# Altium PCB PCB2.PcbDoc (part 1 of 2)
Units mm, origin at the board's own origin, x right, y up, seen from the top; angles counter-clockwise.
Board outline 392.94 x 181.74 mm, 2 copper layers (Top Layer, Bottom Layer); 104 components, 82 nets, 455 pads, 733 vias.
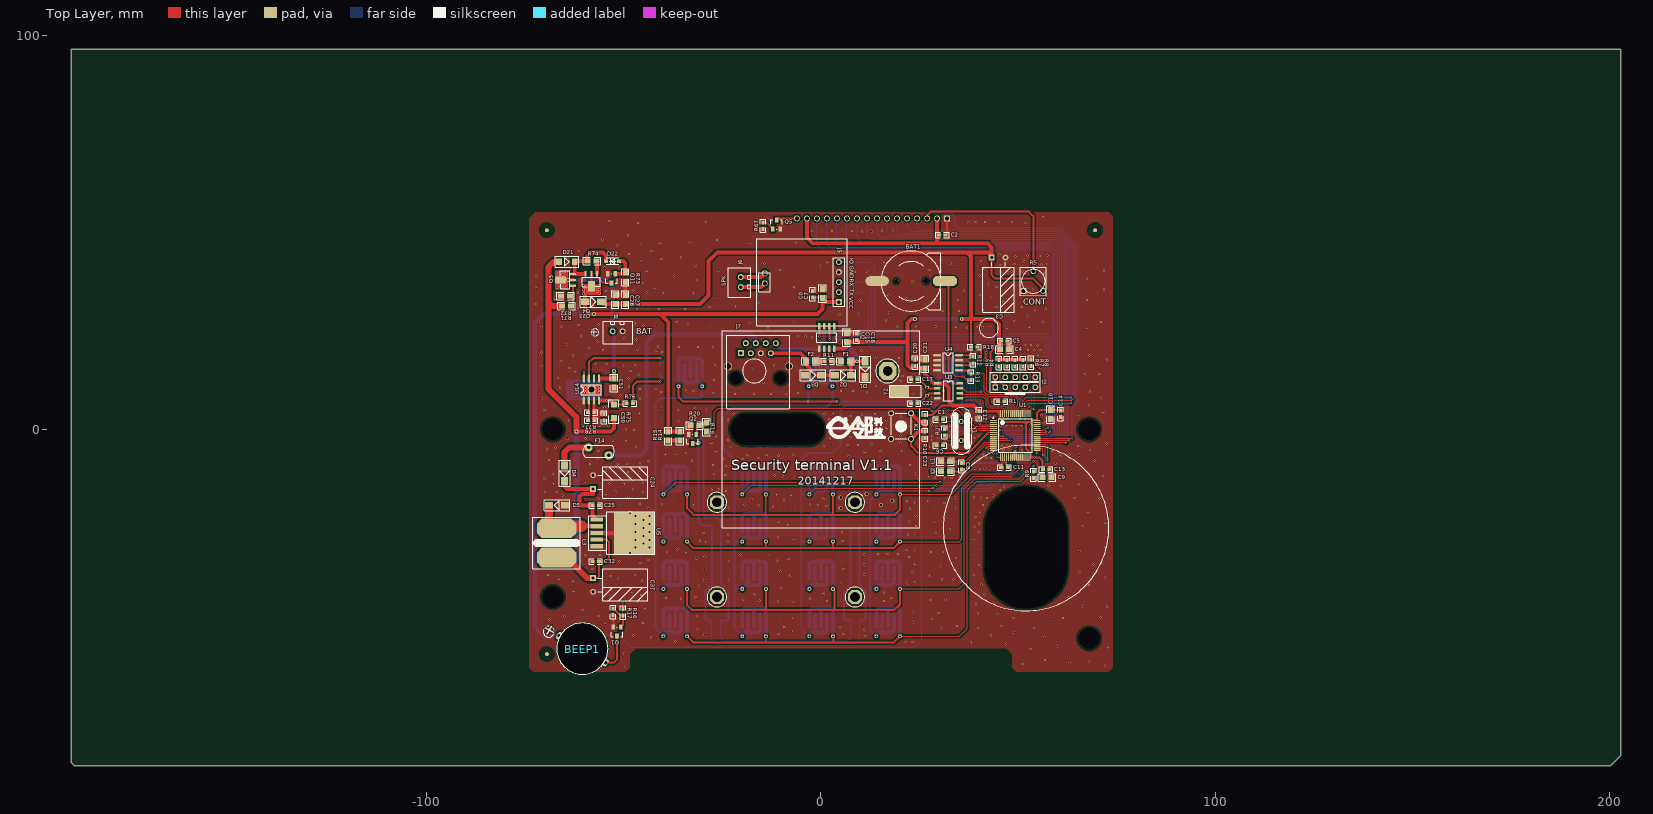
[diagram p0: Top Layer view]
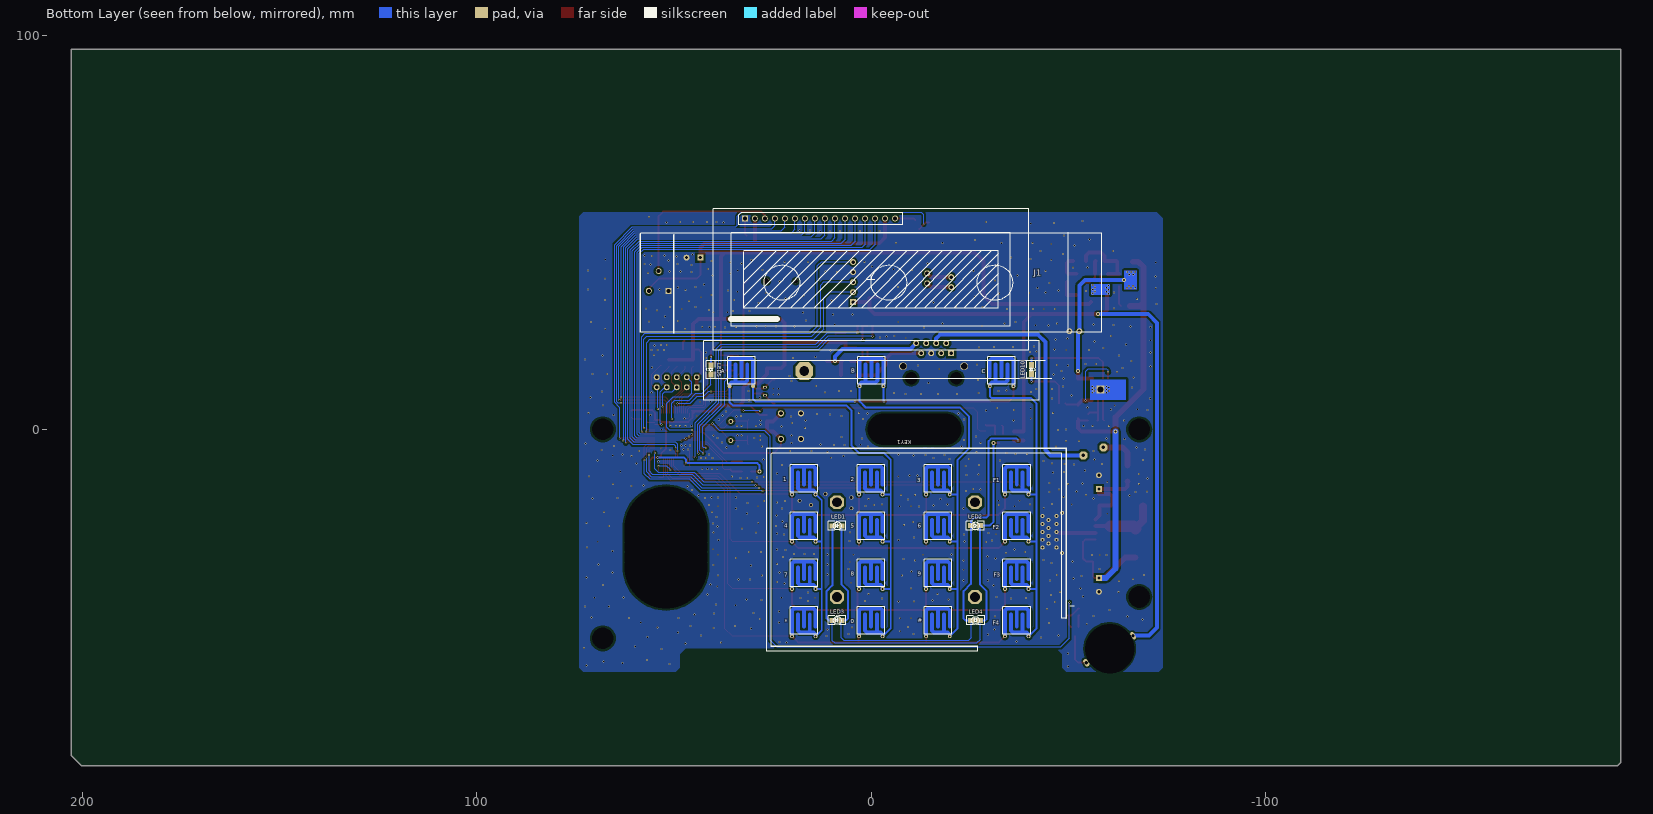
[diagram p1: Bottom Layer view, seen from below]

## Layer stack, top to bottom
Top Solder: solder mask 0.0102, Solder Resist, Dk 3.5
Top Layer: signal copper 0.0356
Dielectric1: dielectric 0.32, FR-4, Dk 4.8
Bottom Layer: signal copper 0.0356
Bottom Solder: solder mask 0.0102, Solder Resist, Dk 3.5

## Board outline
-190.119,96.393 202.819,96.393 202.819,-82.677 200.66,-84.836 200.152,-85.344 -54.229,-85.344 -189.23,-85.344 -190.119,-84.455

## Design rules (kind name [scope] priority, off if disabled: settings)
Clearance [All] p1: gap=0.5
PolygonConnect [All] p1: connectstyle=Direct reliefconductorwidth=0.5 reliefentries=4 polygonreliefangle="90 Angle" airgapwidth=0.254
RoutingVias [All] p1: holewidth=0.711 width=1.27 viastyle="Through Hole" minholewidth=0.711 minwidth=1.27 maxholewidth=0.711 maxwidth=1.27
SilkToSolderMaskClearance SilkscreenOverComponentPads [IsPad] p1: minsilkscreentomaskgap=0.254 clearancetoexposedcopper=TRUE
SolderMaskExpansion [All] p1: expansion=0.102
Width [All] p1: maxlimit=5 minlimit=0.254 preferedwidth=0.254
28 further rules are at their usual default settings.

## Components (designator, comment, footprint, x,y, rotation, side; value= is the part's Value field where it differs from the comment)
BAT1 "BATT" CR1220 22.86,37.592 r90 top locked
BEEP1 "BEEP" BEEP-12W -66.45,-52.324 r330 top locked
C0 "0.1uF" 0603 -2.119,35.13 r270 top locked
C1 "18p" 0603 30.988,2.54 r180 top locked
C2 "0.1uF" 0603 29.972,49.276 r0 top locked
C3 "470uF" RB3.5-w#1 50.292,41.148 r0 top locked
C4 "0.1uF" 0603 47.344,22.464 r180 top locked
C5 "10uF" 0805 47.738,20.302 r180 top locked
C6 "18p" 0603 30.988,-4.064 r180 top locked
C7 "10uF/16V" 0805 0.421,35.638 r270 top locked
C8 "0.1uF" 0603 35.668,-10.216 r90 top locked
C9 "10uF/25V" 0805 58.42,-12.192 r180 top locked
C10 "10uF/25V" 0805 58.24,2.572 r90 top locked
C11 "0.1uF" 0603 45.72,-9.652 r0 top locked
C12 "0.1uF" 0603 40.132,3.048 r90 top locked
C13 "0.1uF" 0603 57.912,-10.16 r180 top locked
C14 "0.1uF" 0603 60.78,3.08 r90 top locked
C15 "10uF" 0805 6.44,22.12 r90 top locked
C16 "0.1uF" 0603 8.98,22.628 r90 top locked
C17 "18P" 0603 22.86,12.7 r0 top locked
C20 "0.1uF" 0603 23.876,17.78 r270 top locked
C21 "10uF" 0805 26.416,17.78 r270 top locked
C22 "18P" 0603 22.86,6.604 r0 top locked
C23 "0.1uF" 0603 26.416,-0.508 r270 top locked
C24 "470uF" RB3.5-w#1 -55.372,-8.128 r90 top locked
C25 "0.1uF" 0603 -56.268,-19.26 r180 top locked
C27 "10uF/25V" 0805 -49.626,31.842 r90 top locked
C28 "0.1uF" 0805 -52.166,31.842 r90 top locked
C31 "470uF" RB3.5-w#2 -55.372,-44.704 r270 top locked
C32 "0.1uF" 0603 -57.912,-33.528 r0 top locked
C50 "0.1uF/25V" 0603 -55.026,2.218 r90 top locked
C51 "10uF/25V" 0805 -52.486,12.886 r270 top locked
D1 "TVS" SMB 11.176,17.272 r270 top locked
D2 "TVS" SMB 3.556,13.716 r0 top locked
D3 "TVS" SMB -4.064,13.716 r0 top locked
D4 "B340" SMB -65.024,-9.144 r270 top locked
D5 "B340" SMB -64.904,-19.26 r180 top locked
D21 "IN4007" SMA(DO-214AC) -66.39,42.51 r0 top locked
D22 "3V" sod-123 -52.832,42.672 r180 top locked
D23 "IN4007" SMB -59.786,32.35 r0 top locked
F1 "FUSE2" 0805 5.08,17.272 r0 top locked
F2 "FUSE2" 0805 -1.524,17.272 r180 top locked
F14 "FUSE2" FUSE-RL60-050 -56.388,-5.588 r180 top locked
J1 "LCD1602A" LCD-1602A 0,38 r180 bottom
J2 "JTAG" JTAG_10 44.196,10.668 r0 top locked
J5 "2.54-7" SYN6288 -16.343,48.338 r270 top locked
J6 "SIP2A-2.50（带槽）" 2.54 -17.78,33.528 r90 top locked
J7 "RJ45" RJ45-1 -20.32,19.304 r180 top locked
J8 "SIP2A-2.54" 2.54 -47.752,27.432 r180 top locked
K1 "KEY_M" KEY_M 22.86,4.064 r270 top locked
KEY1 "SW-17" KEY-17 -2.032,-18.796 r0 top locked
L1 "100R" 0805 30.48,-8.128 r0 top locked
L2 "100R" 0805 30.48,-10.668 r0 top locked
L3 "33uH" INDUCTOR-1212 -73.032,-22.308 r270 top locked
LED1 "" LED-0805 7.5,-24.45 r0 bottom locked
LED2 "" LED-0805 -25.3,-24.384 r180 bottom locked
LED3 "" LED-0805 7.5,-48.45 r0 bottom locked
LED4 "" LED-0805 -25.4,-48.45 r180 bottom locked
LED5 "LED-R" LED-0805 40.64,16.256 r270 bottom locked
LED10 "LED-R" LED-0805 -40.64,14 r90 bottom
Q1 "3904" SOT-23 -50.758,-50.171 r180 top locked
Q2 "3904" SOT-23 -31.605,-1.242 r180 top locked
Q3 "2SJ517" SOT-89 -62.834,36.414 r90 top locked
Q4 "2SJ517" SOT-89 -56.738,39.462 r180 top locked
Q5 "3904" SOT-23 -12.192,50.8 r0 top
Q11 "3904" SOT-23 -52.166,39.462 r180 top locked
R1 "10K" 0603 46.5,7.112 r180 top locked
R2 "1M" 0603 31.284,0.084 r270 top locked
R3 "10K" 0603 45.098,17.65 r270 top locked
R4 "10K" 0603 47.13,17.65 r270 top locked
R5 "10K" RM065-V1 53.848,40.132 r270 top locked
R6 "10K" 0603 49.162,17.65 r270 top locked
R7 "10K" 0603 51.194,17.65 r270 top locked
R8 "10K" 0603 53.226,16.126 r90 top locked
R9 "10K" 0603 53.848,-10.668 r270 top locked
R10 "10K" 0603 26.416,2.032 r90 top locked
R11 "120R" 0603 2.54,17.272 r180 top locked
R12 "4.7K" 0603 38.6,16.764 r90 top locked
R13 "4.7K" 0603 38.1,14.224 r270 top locked
R14 "510R" 0805 -35.8,-0.532 r270 top locked
R15 "510R" 0805 -38.732,-0.532 r270 top locked
R16 "1K" 0603 -50.25,-45.599 r270 top locked
R17 "10K" 0603 -52.79,-47.123 r90 top locked
R18 "1K" 0603 39.751,20.828 r180 top locked
R19 "1K" 0805 -29.08,-0.532 r90 top locked
R20 "10K" 0805 -33.144,0.992 r0 top locked
R67 "10K" 0603 -14.732,50.8 r90 top
R71 "120" 0805 -63.342,31.334 r180 top locked
R72 "4.7K" 0805 -65.882,33.874 r0 top locked
R73 "4.7K" 0805 -49.626,37.43 r90 top locked
R74 "4.7K" 0805 -56.896,42.672 r180 top locked
R75 "0.4" 1206 -52.486,6.282 r270 top locked
R76 "1K" 0603 -49.276,6.604 r0 top locked
R77 "2.7K" 0603 -59.09,4.25 r0 top locked
R78 "2.7K" 0603 -59.09,2.218 r0 top locked
U1 "STM32F103RBT6" LQFP64_N 49.276,-1.524 r0 top locked
U2 "SP3485" SOP-8 3.392,26.184 r270 top locked
U3 "DS1302" SOP-8 29.464,11.684 r0 top locked
U4 "24C02" SO-8 29.464,18.796 r0 top locked
U5 "LM2596S_5.0" TO-263-5 -56.896,-22.86 r180 top locked
U14 "TP4056" SO8E -60.106,7.298 r90 top locked
Y1 "8MHz" XTAL_US 35.56,2.032 r270 top locked
Y2 "32.768KHz" cs-308 25.4,8.128 r180 top locked
? "Comment" e邻 4.572,-2.032 r0 top locked

## Footprints (in the part's own frame and the unit in brackets; to place one, negate y for a bottom-side part, rotate by r counter-clockwise, add the part's x,y. Pads: shape width x height; smd on the part's side, far side on the other; paste and mask are expansions set on the pad)
2.54 [mm]
  round 1.5 hole 0.9: 1(5.08,2.54) 2(2.54,2.54)
  silkscreen extent 0,0 7.5,5.7
0603 [mil]
  rect 40x30 smd: 1(0,0) 2(65,0)
  silkscreen extent -33,-28 98,28
0805 [mil]
  rect 60x50 smd: 1(0,0) 2(90,0)
  silkscreen extent -42,-37 132,37
1206 [mil]
  rect 60x60 smd: 1(0,0) 2(135,0)
  silkscreen extent -50,-50 185,50
BEEP-12W [mm]
  oval 1x2 hole 0.8: 1(0,0)
  oval 1.2x2 hole 0.8: 2(13.7,0)
CR1220 [mm]
  round 1.1 hole 1.1 unplated: 0(0,3.748)
  round 1.5 hole 1.5 unplated: 0(0.025,-3.752)
  oct 2.5x6 smd: 1(0,-8.602)
  oval 2.5x6 smd: 2(0,8.598)
  silkscreen extent -7.62,-7.58 7.62,7.57
cs-308 [mm]
  oval 1x0.7 hole 0.5: 1(-1.524,-0.508) 2(-1.524,-2.54)
  rect 5x3 smd: 3(5.588,-1.524)
  silkscreen extent 0,-3 8,0
e邻 [mm]
  silkscreen extent -3.2,-0.25 11.91,5.33
FUSE-RL60-050 [mm]
  oct 2x2 hole 0.9: 1(-2.55,1) 2(2.55,-1)
  silkscreen extent -4.02,-1.5 4.02,1.5
INDUCTOR-1212 [mm]
  oct 5x10 smd: 1(2.8,6) 2(10.2,6)
  silkscreen extent 0,0 13,12
JTAG_10 [mm]
  rect 1.5x1.5 hole 0.9: 1(0,0)
  round 1.5 hole 0.9: 2(0,2.54) 3(2.54,0) 4(2.54,2.54) 5(5.08,0) 6(5.08,2.54) 7(7.62,0) 8(7.62,2.54) 9(10.16,0) 10(10.16,2.54)
  silkscreen extent -1.27,-1.78 11.43,3.81
KEY-17 [mm]
  round 1 hole 0.5: 1(22.075,2.325) 2(16.075,2.325) 3(5.075,2.325) 4(-0.925,2.325) 5(-11.925,2.325) 6(-17.925,2.325) 7(-31.925,2.325) 8(-37.925,2.325) 9(22.075,-9.675) 10(16.075,-9.675) 11(5.075,-9.675) 12(-0.925,-9.675) 13(-11.925,-9.675) 14(-17.925,-9.675) 15(-31.925,-9.675) 16(-37.925,-9.675) 17(22.075,-21.675) 18(16.075,-21.675) 19(5.075,-21.675) 20(-0.925,-21.675) 21(-11.925,-21.675) 22(-17.925,-21.675) 23(-31.925,-21.675) 24(-37.925,-21.675) 25(22.075,-33.675) 26(16.075,-33.675) 27(5.075,-33.675) 28(-0.925,-33.675) 29(-11.925,-33.675) 30(-17.925,-33.675) 31(-31.925,-33.675) 32(-37.925,-33.675) 35(-1.075,29.725) 36(4.925,29.725) 37(-34.075,29.725) 38(-28.075,29.725)
  round 1 smd far side: 33(31.925,29.725) 34(37.925,29.725)
  Bottom Layer lines w1: -37.925,-33.675 -37.925,-33.175 -37.425,-32.675 -33.925,-32.675 -33.425,-32.175 -33.425,-28.175 ; -37.925,-31.175 -37.925,-27.175 -37.425,-26.675 -32.425,-26.675 -31.925,-27.175 -31.925,-33.675 ; -37.925,-21.675 -37.925,-21.175 -37.425,-20.675 -33.925,-20.675 -33.425,-20.175 -33.425,-16.175 ; -37.925,-19.175 -37.925,-15.175 -37.425,-14.675 -32.425,-14.675 -31.925,-15.175 -31.925,-21.675 ; -37.925,-9.675 -37.925,-9.175 -37.425,-8.675 -33.925,-8.675 -33.425,-8.175 -33.425,-4.175 ; -37.925,-7.175 -37.925,-3.175 -37.425,-2.675 -32.425,-2.675 -31.925,-3.175 -31.925,-9.675 ; -37.925,2.325 -37.925,2.825 -37.425,3.325 -33.925,3.325 -33.425,3.825 -33.425,7.825 ; -37.925,4.825 -37.925,8.825 -37.425,9.325 -32.425,9.325 -31.925,8.825 -31.925,2.325 ; -36.425,-32.675 -36.425,-28.175 ; -36.425,-20.675 -36.425,-16.175 ; -36.425,-8.675 -36.425,-4.175 ; -36.425,3.325 -36.425,7.825 ; -34.925,-31.175 -34.925,-26.675 ; -34.925,-19.175 -34.925,-14.675 ; -34.925,-7.175 -34.925,-2.675 ; -34.925,4.825 -34.925,9.325 ; -34.075,29.725 -34.075,36.225 -33.575,36.725 -28.575,36.725 -28.075,36.225 -28.075,32.225 ; -32.575,35.225 -32.575,31.225 -32.075,30.725 -28.575,30.725 -28.075,30.225 -28.075,29.725 ; -31.075,32.225 -31.075,36.725 ; -29.575,30.725 -29.575,35.225 ; -17.925,-33.675 -17.925,-33.175 -17.425,-32.675 -13.925,-32.675 -13.425,-32.175 -13.425,-28.175 ; -17.925,-31.175 -17.925,-27.175 -17.425,-26.675 -12.425,-26.675 -11.925,-27.175 -11.925,-33.675 ; -17.925,-21.675 -17.925,-21.175 -17.425,-20.675 -13.925,-20.675 -13.425,-20.175 -13.425,-16.175 ; -17.925,-19.175 -17.925,-15.175 -17.425,-14.675 -12.425,-14.675 -11.925,-15.175 -11.925,-21.675 ; -17.925,-9.675 -17.925,-9.175 -17.425,-8.675 -13.925,-8.675 -13.425,-8.175 -13.425,-4.175 ; -17.925,-7.175 -17.925,-3.175 -17.425,-2.675 -12.425,-2.675 -11.925,-3.175 -11.925,-9.675 ; -17.925,2.325 -17.925,2.825 -17.425,3.325 -13.925,3.325 -13.425,3.825 -13.425,7.825 ; -17.925,4.825 -17.925,8.825 -17.425,9.325 -12.425,9.325 -11.925,8.825 -11.925,2.325 ; -16.425,-32.675 -16.425,-28.175 ; -16.425,-20.675 -16.425,-16.175 ; -16.425,-8.675 -16.425,-4.175 ; -16.425,3.325 -16.425,7.825 ; -14.925,-31.175 -14.925,-26.675 ; -14.925,-19.175 -14.925,-14.675 ; -14.925,-7.175 -14.925,-2.675 ; -14.925,4.825 -14.925,9.325 ; -1.075,29.725 -1.075,36.225 -0.575,36.725 4.425,36.725 4.925,36.225 4.925,32.225 ; -0.925,-33.675 -0.925,-33.175 -0.425,-32.675 3.075,-32.675 3.575,-32.175 3.575,-28.175 ; -0.925,-31.175 -0.925,-27.175 -0.425,-26.675 4.575,-26.675 5.075,-27.175 5.075,-33.675 ; -0.925,-21.675 -0.925,-21.175 -0.425,-20.675 3.075,-20.675 3.575,-20.175 3.575,-16.175 ; -0.925,-19.175 -0.925,-15.175 -0.425,-14.675 4.575,-14.675 5.075,-15.175 5.075,-21.675 ; -0.925,-9.675 -0.925,-9.175 -0.425,-8.675 3.075,-8.675 3.575,-8.175 3.575,-4.175 ; -0.925,-7.175 -0.925,-3.175 -0.425,-2.675 4.575,-2.675 5.075,-3.175 5.075,-9.675 ; -0.925,2.325 -0.925,2.825 -0.425,3.325 3.075,3.325 3.575,3.825 3.575,7.825 ; -0.925,4.825 -0.925,8.825 -0.425,9.325 4.575,9.325 5.075,8.825 5.075,2.325 ; 0.425,35.225 0.425,31.225 0.925,30.725 4.425,30.725 4.925,30.225 4.925,29.725 ; 0.575,-32.675 0.575,-28.175 ; 0.575,-20.675 0.575,-16.175 ; 0.575,-8.675 0.575,-4.175 ; 0.575,3.325 0.575,7.825 ; 1.925,32.225 1.925,36.725 ; 2.075,-31.175 2.075,-26.675 ; 2.075,-19.175 2.075,-14.675 ; 2.075,-7.175 2.075,-2.675 ; 2.075,4.825 2.075,9.325 ; 3.425,30.725 3.425,35.225 ; 16.075,-33.675 16.075,-33.175 16.575,-32.675 20.075,-32.675 20.575,-32.175 20.575,-28.175 ; 16.075,-31.175 16.075,-27.175 16.575,-26.675 21.575,-26.675 22.075,-27.175 22.075,-33.675 ; 16.075,-21.675 16.075,-21.175 16.575,-20.675 20.075,-20.675 20.575,-20.175 20.575,-16.175 ; 16.075,-19.175 16.075,-15.175 16.575,-14.675 21.575,-14.675 22.075,-15.175 22.075,-21.675 ; 16.075,-9.675 16.075,-9.175 16.575,-8.675 20.075,-8.675 20.575,-8.175 20.575,-4.175 ; 16.075,-7.175 16.075,-3.175 16.575,-2.675 21.575,-2.675 22.075,-3.175 22.075,-9.675 ; 16.075,2.325 16.075,2.825 16.575,3.325 20.075,3.325 20.575,3.825 20.575,7.825 ; 16.075,4.825 16.075,8.825 16.575,9.325 21.575,9.325 22.075,8.825 22.075,2.325 ; 17.575,-32.675 17.575,-28.175 ; 17.575,-20.675 17.575,-16.175 ; 17.575,-8.675 17.575,-4.175 ; 17.575,3.325 17.575,7.825 ; 19.075,-31.175 19.075,-26.675 ; 19.075,-19.175 19.075,-14.675 ; 19.075,-7.175 19.075,-2.675 ; 19.075,4.825 19.075,9.325 ; 31.925,29.725 31.925,36.225 32.425,36.725 37.425,36.725 37.925,36.225 37.925,32.225 ; 33.425,35.225 33.425,31.225 33.925,30.725 37.425,30.725 37.925,30.225 37.925,29.725 ; 34.925,32.225 34.925,36.725 ; 36.425,30.725 36.425,35.225
KEY_M [mil]
  round 62 hole 38: 1(0,0) 1(255.91,0) 2(0,-200) 2(255.91,-200)
  silkscreen extent 0,-200 255,0
LCD-1602A [mm]
  rect 1.5x1.5 hole 1: 1(-32,15.5)
  round 1.5 hole 1: 2(-29.46,15.5) 3(-26.92,15.5) 4(-24.38,15.5) 5(-21.84,15.5) 6(-19.3,15.5) 7(-16.76,15.5) 8(-14.22,15.5) 9(-11.68,15.5) 10(-9.14,15.5) 11(-6.6,15.5) 12(-4.06,15.5) 13(-1.52,15.5) 14(1.02,15.5) 15(3.56,15.5) 16(6.1,15.5)
  silkscreen extent -40,-18 40,18
LED-0805 [mil]
  rect 60x50 smd: 1(0,0) 2(90,0)
  silkscreen extent -43,-46 134,45
LQFP64_N [mm] "Thin QFP, 64-Leads, Body 10x10mm, Pitch 0.5mm, IPC Medium Density"
  oval 1.8x0.3 smd: 1(-5.55,3.75) 2(-5.55,3.25) 3(-5.55,2.75) 4(-5.55,2.25) 5(-5.55,1.75) 6(-5.55,1.25) 7(-5.55,0.75) 8(-5.55,0.25) 9(-5.55,-0.25) 10(-5.55,-0.75) 11(-5.55,-1.25) 12(-5.55,-1.75) 13(-5.55,-2.25) 14(-5.55,-2.75) 15(-5.55,-3.25) 16(-5.55,-3.75) 33(5.55,-3.75) 34(5.55,-3.25) 35(5.55,-2.75) 36(5.55,-2.25) 37(5.55,-1.75) 38(5.55,-1.25) 39(5.55,-0.75) 40(5.55,-0.25) 41(5.55,0.25) 42(5.55,0.75) 43(5.55,1.25) 44(5.55,1.75) 45(5.55,2.25) 46(5.55,2.75) 47(5.55,3.25) 48(5.55,3.75)
  oval 0.3x1.8 smd: 17(-3.75,-5.55) 18(-3.25,-5.55) 19(-2.75,-5.55) 20(-2.25,-5.55) 21(-1.75,-5.55) 22(-1.25,-5.55) 23(-0.75,-5.55) 24(-0.25,-5.55) 25(0.25,-5.55) 26(0.75,-5.55) 27(1.25,-5.55) 28(1.75,-5.55) 29(2.25,-5.55) 30(2.75,-5.55) 31(3.25,-5.55) 32(3.75,-5.55) 49(3.75,5.55) 50(3.25,5.55) 51(2.75,5.55) 52(2.25,5.55) 53(1.75,5.55) 54(1.25,5.55) 55(0.75,5.55) 56(0.25,5.55) 57(-0.25,5.55) 58(-0.75,5.55) 59(-1.25,5.55) 60(-1.75,5.55) 61(-2.25,5.55) 62(-2.75,5.55) 63(-3.25,5.55) 64(-3.75,5.55)
  silkscreen extent -5.67,-4.25 4.25,4.57, body extent -5,-5 5,5, height 1.6
RB3.5-w#1 [mm]
  rect 1.5x1.5 hole 0.813: 1(-7,2.4)
  round 1.5 hole 0.813: 2(-3.5,2.4)
  silkscreen extent -9.3,-11.5 -1.3,1.2
RB3.5-w#2 [mm]
  rect 1.5x1.5 hole 0.813: 1(-7,-2.4)
  round 1.5 hole 0.813: 2(-3.5,-2.4)
  silkscreen extent -9.3,-1.2 -1.3,11.5
RJ45-1 [mil]
  rect 60x60 hole 35: 1(0,0)
  round 60 hole 35: 2(-50,-100) 3(-100,0) 4(-150,-100) 5(-200,0) 6(-250,-100) 7(-300,0) 8(-350,-100)
  round 78.74 hole 64.96: 9(129.92,130) 10(-480.31,130)
  oct 0x0 hole 125.98: ""(-400,250) ""(50,250)
  silkscreen extent -490,-180 140,553
RM065-V1 [mm]
  rect 1.5x1.5 hole 1: 1(5,-2.5)
  round 1.5 hole 1: 2(0,0) 3(5,2.5)
  silkscreen extent -1.02,-3.25 6.2,3.25
SMA(DO-214AC) [mm]
  rect 1.5x1.6 smd: 1(0,0) 2(3.95,0)
  silkscreen extent -1,-1.38 5,1.38
SMB [mm]
  rect 2.1x1.7 smd: 1(0,0) 2(4.05,0)
  silkscreen extent -1.25,-1.4 5.3,1.4
SO8E [mil]
  oval 80x24 smd: 1(0,0) 2(0,-50) 3(0,-100) 4(0,-150) 5(220,-150) 6(220,-100) 7(220,-50) 8(220,0)
  rect 78.74x78.74 hole 59.05: 9(110,-75)
  silkscreen extent 60,-175 160,25
SO-8 [mil]
  oval 80x24 smd: 1(0,0) 2(0,-50) 3(0,-100) 4(0,-150) 5(220,-150) 6(220,-100) 7(220,-50) 8(220,0)
  silkscreen extent 60,-175 160,25
sod-123 [mil]
  rrect25% 40x35 smd: 1(-64,0) 2(64,0)
  silkscreen extent -62,-33 62,34, body extent -76,-33 76,34, height 56
SOP-8 [mil]
  rect 65x25 smd: 1(0,0) 2(0,-50) 3(0,-100) 4(0,-150) 5(224.41,-150) 6(224.41,-100) 7(224.41,-50) 8(224.41,0)
  silkscreen extent 65,-175 159,25
SOT-23 [mil]
  rect 36x50 smd: 1(0,0) 2(75,0) 3(37.5,90)
  silkscreen extent -20,0 95,95
SOT-89 [mm]
  rect 0.52x1.5 smd: 1(0,0) 2(1.5,0) 3(3,0)
  rect 1.8x2.7 smd: 4(1.5,3.2)
  silkscreen extent -0.8,0.9 3.8,3.25
SYN6288 [mm]
  rect 1.5x1.5 hole 0.9: 1(16.08,20.9)
  round 1.5 hole 0.9: 2(13.54,20.9) 3(11,20.9) 4(8.46,20.9) 5(5.92,20.9)
  round 1.5 hole 1: 6(8.76,2.1) 7(11.3,2.1)
  silkscreen extent 0,0 22,23
TO-263-5 [mm]
  rect 3.176x1.07 smd: 1(0,0) 2(0,1.7) 3(0,3.4) 4(0,5.1) 5(0,6.8)
  round 1 hole 0.5: 6(-8.45,-1.695) 8(-8.45,8.465)
  rect 10.16x10.668 smd: 7(-9.5,3.404)
  silkscreen extent -14.73,-2 1.98,8.8
XTAL_US [mil]
  round 50 hole 28: 1(0,0) 2(192.13,0)
  silkscreen extent -136,-98 328,98

## Part data
BAT1: library part BAT
C0 C1 C6 C7: library part CAP, "陶瓷电容"
C2 C3 C4 C5 C8 C9 C10 C11 C12 C13 C14 C15 C16 C20 C21 C23 C24 C27 C28 C31 C50 C51: library part CAP
C17 C22 C25 C32: library part C
D1 D2 D3: "SMBJ12CA"
D4: library part 1N5824(SS54), "肖特基二极管"
D5 D21 D23: library part DIODE
D22: library part 1N5824(SS54), "3V稳压管"
F1 F2: "SMD0805P010TS"
F14: "RL60-050"
J2: library part JTAG_10
J8: library part SIP2A-2.50（带槽）
L1 L2 L3: library part INDUCTOR
LED1 LED2 LED3 LED4: library part LED, "蓝色LED"
LED5: library part LED-RED, "绿色LED"
LED10: library part LED-RED, "红色LED"
Q1 Q2 Q5 Q11: library part NPN1
Q3 Q4: library part "MOSFET P_1"
R1 R9 R10 R14 R15 R75 R76 R77 R78: library part RES1
R2 R3 R4 R6 R7 R8 R11 R12 R13: library part RES-1%, "高精度电阻"
R5: library part POT2
R16 R17 R19 R20 R67: library part R
R18: library part Res
R71 R72 R73 R74: library part RESISTOR, "Resistor"
U2: library part MAX3485
U3: "实时时钟"
U4: library part 24C256
U5: "3A开关电源芯片"
Y1 Y2: library part XTAL, "Crystal Oscillator"

## Free pads (board coordinates)
  oct 1x1 hole 0.5: 0(-43.5,-22) 1(-43.5,-24) 2(-43.5,-26) 3(-43.5,-28) 4(-43.5,-30) 5(-45,-23) 6(-45,-25) 7(-45,-27) 8(-45,-29) 9(-47,-30) 10(-47,-28) 11(-47,-26) 12(-47,-24) 13(-47,-22)
  round 1 smd mask+1: 2(-69.5,-57) 2(-69.5,50.5) 2(69.5,50.5)
  oct 0.5x0.5 hole 0.3: 14(-67,39.9) 15(-66,39.9) 16(-65,39.9) 17(-67,35.9) 18(-65.9,35.9) 19(-64.9,35.9) 20(-65.5,39.3) 21(-66.5,39.3) 22(-66.4,36.4) 23(-65.4,36.4) 24(-56.2,34.5) 25(-56.2,35.5) 26(-56.2,36.6) 27(-56.8,36) 28(-56.8,35) 29(-60.2,34.4) 30(-60.2,35.4) 31(-60.2,36.5) 32(-59.7,35.9) 33(-59.7,34.9)
  round 0 hole 5.5: ""(-68,-42.5) ""(-68,0) ""(68,-53) ""(68,0)
  round 0 hole 12.5: ""(-60.5,-55.6)
  oct 3.5x3.5 hole 2.5: ""(-26.4,-42.5) ""(-26.4,-18.5) ""(8.6,-42.5) ""(8.6,-18.5)
  round 0 hole 8: ""(-18.999,0) ""(-18,0) ""(-17.069,0) ""(-16.2,0) ""(-15.062,0) ""(-14.2,0) ""(-13.005,0) ""(-12,0) ""(-11.049,0) ""(-10.2,0) ""(-9.144,0) ""(-8.2,0) ""(-7.061,0) ""(-6.1,0) ""(-5.105,0) ""(-4.1,0) ""(-3.099,0)
  oct 4.5x4.5 hole 2.5: ""(16.925,14.8)
  round 0 hole 21: ""(51.994,-34.95) ""(51.994,-32.461) ""(51.994,-29.87) ""(51.994,-27.356) ""(51.994,-24.968)

## Via types
v1: diameter 0.5, hole 0.3, Top Layer to Bottom Layer, tented both sides, 719 vias
v2: diameter 1, hole 0.5, Top Layer to Bottom Layer, tented both sides, 9 vias
v3: diameter 1, hole 0.7, Top Layer to Bottom Layer, tented both sides, 5 vias

## Nets (pads, with @x,y where several pads share a name; then routed paths per layer and width w, separated by ;. In a path a pad name is that pad's centre, name@x,y a point inside that pad or via, vN(x,y) a via of type N, cw(c..) or ccw(c..) an arc to the next point about the centre after c; other vN are vias at no path point)
485_A: D2.1 D3.2 F2.2 J7.7 | length 19.4
  Top Layer w1: J7.7@-12.7,19.304 -5.204,19.304 -3.81,17.91 F2.2@-3.81,17.272 -3.81,16.41 -1.116,13.716 D3.2@-0.014,13.716 D2.1@3.556,13.716
485_B: D1.1 D2.2 F1.2 J7.8 | length 30.9
  Top Layer w0.5: D2.2@7.366,13.956 D2.2@7.606,13.716
  Top Layer w1: D2.2@7.606,13.716 7.606,17.032 F1.2@7.366,17.272 v2(9.1,17.272) D1.1@11.176,17.272
  Bottom Layer w1: J7.8@-11.43,21.844 -9.986,20.4 7.2,20.4 9.1,18.5 v2(9.1,17.272)
BEEP: R16.1 U1.3 | length 161.5
  Top Layer w0.254: v1(-50.3,-43.9) -50.3,-45.549 R16.1@-49.949,-45.549 ; v1(40.2,1.5) 40.474,1.226 U1.3@43.726,1.226 42.274,1.226
  Bottom Layer w0.254: v1(-50.3,-43.9) -50.3,-53 -48,-55.3 23.8,-55.3 25.6,-53.5 25.6,-1.7 27,-0.3 38.4,-0.3 v1(40.2,1.5)
DS_IO: U1.61 U3.6 | length 15.4
  Top Layer w0.254: U3.6@35.5,8.992 35.408,8.9 41.3,8.9 42.4,7.8 42.4,6.4 42.8,6 46.5,6 47.026,5.474 U1.61@47.026,4.026
DS_RST: U1.62 U3.5 | length 14.8
  Top Layer w0.254: U3.5@35.164,7.874 36.1,7.874 36.531,8.305 41.095,8.305 41.9,7.5 41.9,6 42.4,5.5 46.1,5.5 46.526,5.074 U1.62@46.526,4.026
DS_SCLK: U1.57 U3.7 | length 18.1
  Top Layer w0.254: U3.7@35.164,10.414 36.086,10.414 36.9,9.6 v1(40.6,9.6) ; U1.57@49.026,4.026 49.026,6.426 v1(49.1,6.5)
  Bottom Layer w0.254: v1(40.6,9.6) 41.234,9.6 42.588,8.246 44.221,8.246 45.967,6.5 v1(49.1,6.5)
GND: BAT1.2 C0.1 C1.2 C2.2 C3.2 C4.1 C5.1 C6.2 C7.1 C9.1 C10.1 C11.1 C12.1 C13.1 C14.1 C15.2 C16.2 C17.1 C20.1 C21.1 C22.1 C23.2 C24.2 C25.1 C27.2 C28.2 C31.2 C32.1 C50.2 C51.2 D1.2 D3.1 D5.1 J1.1 J2.10 J5.4 J7.5 J7.9 J7.10 J8.2 K1.2 L1.1 pad.0 pad.1 pad.2@-43.5,-26 pad.3 pad.4 pad.5 pad.6 pad.7 pad.8 pad.9 pad.10 pad.11 pad.12 pad.13 Q1.2 Q2.2 Q5.2 Q11.2 R1.2 R5.1 R8.2 R9.2 R17.1 R20.1 R67.1 R72.1 R73.1 R77.2 R78.2 U1.18 U1.31 U1.47 U1.63 U2.5 U3.4 U4.1 U4.2 U4.3 U4.4 U4.7 U5.3 U5.5 U5.6 U5.7 U5.8 U14.1 U14.3 Y2.3 | length 56.9
  Top Layer w0.254: C11.1@45.72,-9.652 46.026,-9.346 U1.18@46.026,-7.074 46.026,-5.326 45.9,-5.2 ; U1.63@46.026,4.026 46.026,3.174 46.5,2.7 v1(47.3,2.7) ; U1.31@52.526,-7.074 52.526,-12.026 52.819,-12.319 R9.2@53.848,-12.319 ; 52.9,-4.604 53.415,-5.12 ; U1.47@54.826,1.726 56.626,1.726 56.9,2 ; C10.1@58.24,2.572 60.272,2.572 C14.1@60.78,3.08
  Top Layer w0.5: U14.3@-57.566,7.298 -57.566,2.345 R78.2@-57.439,2.218 ; R77.2@-57.439,4.25 -55.407,4.25 C50.2@-55.026,3.869 ; R17.1@-52.79,-47.123 -52.663,-47.25 Q1.2@-52.663,-50.171 ; Q2.2@-33.51,-1.242 -33.51,0.626 R20.1@-33.144,0.992 ; C15.2@6.44,24.406 8.853,24.406 C16.2@8.98,24.279 ; C2.2@31.623,49.216 32,49.593 32,52.635 J1.1@32,53.5 ; C4.1@47.344,22.464 47.738,22.07 C5.1@47.738,20.302
  Top Layer w1: U5.3@-56.896,-26.26 -47.4,-26.26 U5.7@-47.396,-26.264 ; C28.2@-52.166,34.128 C27.2@-49.626,34.128 R73.1@-49.626,37.43
  other v1: -50,-60.1 72.2,-59.9 51.1,-59.5 63,-59.3 67.8,-58.9 56.8,-58.5 -49.9,-56.8 53.1,-55.7 72.8,-55.5 59.8,-55.1 47.1,-54.3 21.4,-54.1 38,-54.1 23.2,-53.9 -36.9,-53.8 -43.1,-52.8 56.7,-52.7 11.3,-52.4 -47.5,-52.3 43.1,-52.3 -29.6,-52 -10.8,-51.9 5.7,-51.9 49,-51.5 -7.4,-51.2 -31.3,-50.8 11.1,-50.7 30.4,-50.5 40,-50.4 4.8,-50.3 54.2,-50.2 -9.4,-50.1 34.5,-49.9 45.8,-49.9 -54.7,-49.4 -45.1,-49.1 23.3,-49 58.4,-49 -68.8,-48.2 28.1,-48.1 -10.1,-47.9 -7.4,-47.9 48.8,-47.8 61.4,-47.8 70.9,-47.7 -65,-47.5 -31.4,-47.5 -56.4,-47.3 44.8,-47 39.8,-46.7 29.8,-46.6 23.3,-46.2 -60.5,-45.8 -44.6,-45.6 66.5,-44.9 72.5,-44.9 34.4,-44.6 39.3,-44.4 -46.7,-43.8 -10.9,-43.7 -7,-43.6 1.5,-43.5 16,-43.5 -15.6,-43.4 27.8,-43.3 -19.6,-43.1 31.6,-43.1 -35.5,-42.9 -2.8,-42.9 -39.3,-42.8 17.9,-42.8 14.2,-42.7 22.7,-42.7 70.1,-42.7 62.8,-42.6 -31.8,-42.5 -53.8,-42.4 -45.6,-42 41.5,-41.9 0.6,-41.8 -16.8,-41.7 16,-41.4 -62.8,-41.3 -47.9,-41.2 -10.1,-40.4 -53.1,-40.3 39,-39.8 -31.1,-39.6 68,-39.5 40.7,-39.4 22,-39.1 5.1,-38.9 23.9,-38.7 -62.9,-38.4 -45.4,-38.3 -29.6,-38.3 -23.5,-38.3 30.7,-38.1 33.6,-38.1 -66.4,-37.9 -51.3,-37.8 72.2,-37.6 -53.4,-37.2 38.8,-37.1 -7.8,-37 27.7,-37 -69.2,-36.9 -47.2,-36.9 11.1,-36.8 23.2,-36.3 65.6,-36.3 -10.3,-36.1 -29.5,-35.6 -23.5,-35.6 -57.9,-35.4 5.7,-35.4 30.5,-34.5 39.9,-34.4 11.1,-34.3 69.1,-34.3 23.9,-34.1 -45.8,-33.9 5.4,-33.6 -51.1,-33.5 -23.5,-33.2 -11.2,-33.2 -43.7,-33.1 -8.2,-32.9 -31.6,-32.7 34.2,-32.6 22.3,-32.4 -29.5,-32.3 -59.7,-31.9 -58,-31.9 -56,-31.9 -13.2,-31.8 4.5,-31.8 38.8,-31.8 -20.4,-31.7 11.1,-31.7 14.5,-31.6 16.9,-31.6 19.5,-31.6 -34.2,-31.4 -39,-31.1 27.9,-31.1 30.9,-31.1 65.6,-30.9 21.7,-30.6 -36.4,-30.5 23.9,-30.5 40.1,-30.4 72,-30 -29.1,-28.6 69.3,-28.5 -23.7,-28.4 5.5,-28.3 -30.7,-28.2 -7,-28.1 38.7,-28.1 -10.9,-27.4 -23.6,-26.7 22.1,-26.7 -31.7,-26.6 23.9,-26.4 -29.8,-26.3 5.3,-26.2 39.9,-26.2 29.2,-26.1 32.7,-25.1 38.9,-24.6 24.1,-24.5 66.5,-24.5 -8.3,-24.3 40.1,-23.9 28.6,-23.8 72.2,-23.7 -10.6,-23.5 22.5,-23.4 39.2,-22.2 24,-21.8 -59.9,-21.4 31.5,-21.3 40.3,-20.9 67.7,-20.9 -23.5,-20.1 22.6,-20.1 34.3,-20.1 -43.8,-20 -12.2,-19.6 -36.4,-19.5 -10.1,-19.5 -7.2,-19.5 28.7,-19.5 38.8,-19.5 1.4,-19.4 -15.8,-19.3 -32.5,-19.2 -0.7,-19.2 41.1,-19.2 -40.3,-19.1 -2.8,-19.1 -50.9,-19 -19.4,-19 -45.9,-18.9 31.3,-18.7 23.9,-18.5 21.8,-18.2 27.2,-18.2 -37.7,-18.1 -32.3,-18.1 -9.4,-17.8 -17.6,-17.7 0.6,-17.7 -56.4,-17.5 70.6,-17.5 42.1,-17.4 64.3,-17.4 34.3,-17.3 38.8,-17.3 40.4,-17.3 -48.8,-17.1 -65.6,-16.8 43.7,-16.8 -54.5,-16.7 -11.1,-16.7 -7.6,-16.6 -67.1,-15.9 -45.3,-15.9 -52.1,-15.8 -70,-15.7 -24.1,-15.6 45.4,-15.4 -47.7,-15.3 -27.8,-15.3 -25.8,-15.1 46.6,-14.5 60.7,-14.4 57.7,-14.2 -68,-13.9 -50,-13.9 65.4,-13.8 -53.6,-13.7 -45.3,-13.6 -59.9,-13.3 -70.1,-12.5 31.5,-12.3 33.1,-12.3 28.9,-12.2 27.1,-12.1 35.3,-12 71.5,-12 -6.9,-11.9 -11.8,-11.7 -9.8,-11.7 -24.2,-11.6 -27.3,-11.5 -68,-11.3 23.8,-11.2 -46.1,-10.9 -48.9,-10.8 63.6,-10.7 -54.2,-10.4 39,-10 40.3,-10 41.5,-10 42.8,-10 -23.9,-9.3 -27.4,-9 22.6,-9 -51.5,-8.9 -58.6,-8.8 -49,-8.8 -45.9,-8.7 59.5,-8.6 53.9,-8.2 -43.7,-8 -32.7,-7.9 69.4,-7.9 -69,-7.8 -56.7,-7.7 27.3,-7.7 -24.9,-7.5 -19.9,-7.5 -15.8,-7.3 40.2,-7.3 41.8,-7.3 43.1,-7.3 10.2,-7.2 7,-6.8 60.7,-6.8 -10.8,-6.6 65.5,-6.6 -18.6,-6.5 -13.8,-6.5 -7,-6.4 41.1,-6.4 63,-6.4 -39.6,-6.2 -36.6,-6.2 -34.4,-6 -26.8,-5.8 11.1,-5.7 -56.4,-5.5 15.1,-5.5 20.6,-5.5 58.9,-5.5 50.8,-5.2 68.4,-5.2 -69.5,-5.1 46.4,-5.1 47.5,-5.1 53.2,-4.7 -67.3,-4.6 36.6,-4.6 0.8,-4.4 33.7,-4.4 -46.9,-4.3 -22.9,-4.3 27.7,-4.3 65.2,-4.2 45.9,-4.1 47,-4.1 48.1,-4.1 6.7,-4 9.4,-4 2.7,-3.9 12.8,-3.8 72.4,-3.6 20.2,-3.5 -27.8,-3.4 37.8,-3.3 -49.4,-3 -52.7,-2.9 -23.6,-2.7 28.2,-2.7 -64.3,-2.4 -59.7,-2.3 2.3,-2.3 29.5,-2.2 38.9,-2.2 7.5,-1.9 -26.6,-1.8 28.2,-1.7 20.2,-1.6 32.9,-1.6 33.9,-1.6 39.9,-1.5 -47.4,-0.2 53.1,-0.1 -49.4,0 16.8,0.4 22.7,0.7 47.1,0.8 48.4,0.8 49.5,0.8 50.8,0.8 -60.4,0.9 -56.2,0.9 -53.9,0.9 29.2,0.9 32.9,0.9 34,0.9 45.5,0.9 28,1.2 20.1,1.6 -64.2,2.2 -36.1,2.3 16.6,2.3 28,2.3 -23.6,2.5 38.6,2.5 2,2.6 -40.5,2.8 20.3,3.3 34.1,3.3 7.5,3.4 33,3.4 44.2,3.4 37.7,3.5 55.9,3.6 65.3,3.7 10.4,3.8 13.7,3.9 -22.2,4 0.9,4 71.7,4.1 -46.2,4.2 3,4.2 36.8,4.5 -29.2,4.8 -70.1,4.9 -36.3,4.9 -60.8,5 -67.6,5.1 -40.5,5.3 -31.9,5.4 -54.9,5.5 68,6 -61.8,6.1 40.7,7 43.4,7 31,7.3 -70.8,7.8 -45.9,7.8 28.2,8.1 71.2,8.1 -50.8,8.6 23.5,8.8 24.8,8.8 -21.8,9 -17,9 -12.7,9 -8.7,9 -27.2,9.2 -5.8,9.2 11.7,9.3 55.7,9.3 -40.6,9.5 68.2,9.6 -32.3,9.7 5.1,9.7 8.1,9.7 31.1,9.7 -34.4,9.8 -45.9,10.2 -42,10.2 23.5,10.3 24.8,10.3 -66.2,10.6 -48.7,10.9 14,11 -14.6,11.8 20.2,12.3 -27.1,12.5 -48.8,12.9 -66.5,13.2 20.7,13.5 -46.3,13.9 67,14 70.6,14 -62.4,14.5 -48.3,14.8 -17.3,15.3 -63.8,15.6 55.6,15.7 -70.9,15.9 -49.9,16.2 -11.9,16.2 -47.2,16.3 -26.9,16.5 -57,16.6 -54.4,16.6 -66.1,17.3 37.1,17.6 72.5,17.7 19.8,18.1 41.9,18.1 14.1,18.4 -62.9,18.7 68.1,18.7 55,18.9 -70.9,19.5 41.9,19.5 -40.3,19.6 -42,19.7 10.3,20 -55.3,20.1 -49.5,20.1 52.5,20.1 54.2,20.1 55.7,20.1 -46.5,20.3 -59,20.6 -27.4,20.7 -36,20.9 -31.2,20.9 -41.3,21 54.9,21.3 51.7,21.4 53.3,21.4 -64.7,21.5 -56.7,22.3 -70.9,22.6 -46.8,22.8 -49.8,23 -8.8,23.2 -2.3,23.3 -3.9,23.5 -60.9,23.7 -6,23.7 47.2,25.4 67.4,25.4 -13.4,25.8 37,25.8 -70.9,25.9 39.6,25.9 41,25.9 42.8,25.9 34.3,26 52.7,26 -65.8,26.1 19.4,26.1 24.1,26.1 26.7,26.1 29,26.1 -28.2,26.2 -45,26.3 -41.7,26.4 -61.5,26.5 -56.4,26.6 9.2,26.6 -47.2,26.8 -18.1,26.8 -33.9,26.9 -36.6,27.2 -6.9,27.2 71,27.2 56.3,27.4 48.9,27.5 16.5,27.6 52.2,28.6 4.7,29.1 9.7,29.1 17.3,29.6 36.4,29.7 39.9,29.7 30.8,30 35,30 54.3,30.1 41.1,30.3 -46.7,30.5 -43.8,30.5 -41.1,30.5 -34.5,30.5 48,30.5 -61.6,30.6 57.1,30.7 -28.3,31 44.5,31 51,31 -21.5,31.2 -72.4,31.8 28.5,32 -15.8,32.2 46.2,32.6 10,32.7 34.8,32.8 67.5,32.8 -67.4,33.1 21.7,33.2 43.1,33.5 -26.3,33.7 17.1,33.9 40.5,34.1 -32.5,34.4 -40.1,34.6 26.7,34.6 -61.6,34.7 -44.3,34.7 33.9,34.9 -54.5,35.1 -47.5,35.2 36.3,35.2 47.1,35.4 53.6,35.5 71.8,35.5 -72.2,35.8 -42.2,35.9 49,36 -6.8,36.1 44.5,36.1 42.3,36.7 -45.3,37.1 23.2,37.5 -31.4,37.7 67.5,38.3 -72.1,38.8 -37.1,39 40.2,39 35.7,39.5 56.6,39.7 8.6,39.9 45.5,39.9 11.5,40 48.3,40 51.1,40 -44.3,40.2 -26,40.2 33.8,40.3 71.8,40.3 -10.4,40.4 27.5,40.4 -5.7,40.6 41.4,40.7 -54.9,41 -51.2,41.1 -0.3,41.3 -31.8,41.6 45.5,41.7 55.9,41.8 49.1,41.9 57.5,41.9 -14.3,42.1 32.8,42.1 -72.2,42.3 35.7,42.3 1.7,42.5 16,42.5 21.9,42.5 40.4,42.7 51.4,42.8 30.3,42.9 -45.7,43 67.4,43.1 -40.4,43.2 -35.5,43.6 49.3,43.8 55.5,44 52.4,44.1 57.4,44.1 45.3,44.3 -48.7,44.5 -61.3,45.2 -43,45.2 -51.6,46.6 -45.7,47 -33.1,47.2 -6.3,47.2 -41,47.3 -18.1,47.3 -26.4,48 -55.4,48.2 -48.9,49.2 10.4,50.2 12.9,50.2 -2.1,50.3 0.2,50.3 2.8,50.3 5.4,50.3 7.9,50.3 15.5,50.4 18.1,50.4 -40.5,52.2 -46.4,52.3 37.4,52.4 51.9,52.5 -29.1,52.6 39.2,52.6 41.6,52.6 45.2,52.6 48.5,52.6 -53.6,52.8 56.3,53.8
  other v3: 5,-20 15.2,-19.2 18.1,-18.1 5,-17.3 11.6,-16.4